# Altium PCB bq25570_board_large.PcbDoc
Units mil, origin at the board's own origin, x right, y up, seen from the top; angles counter-clockwise.
Board outline 3738 x 2350 mil, 2 copper layers (Top, Bottom), stack 61.811 mil thick; 28 components, 19 nets, 83 pads, 0 vias.
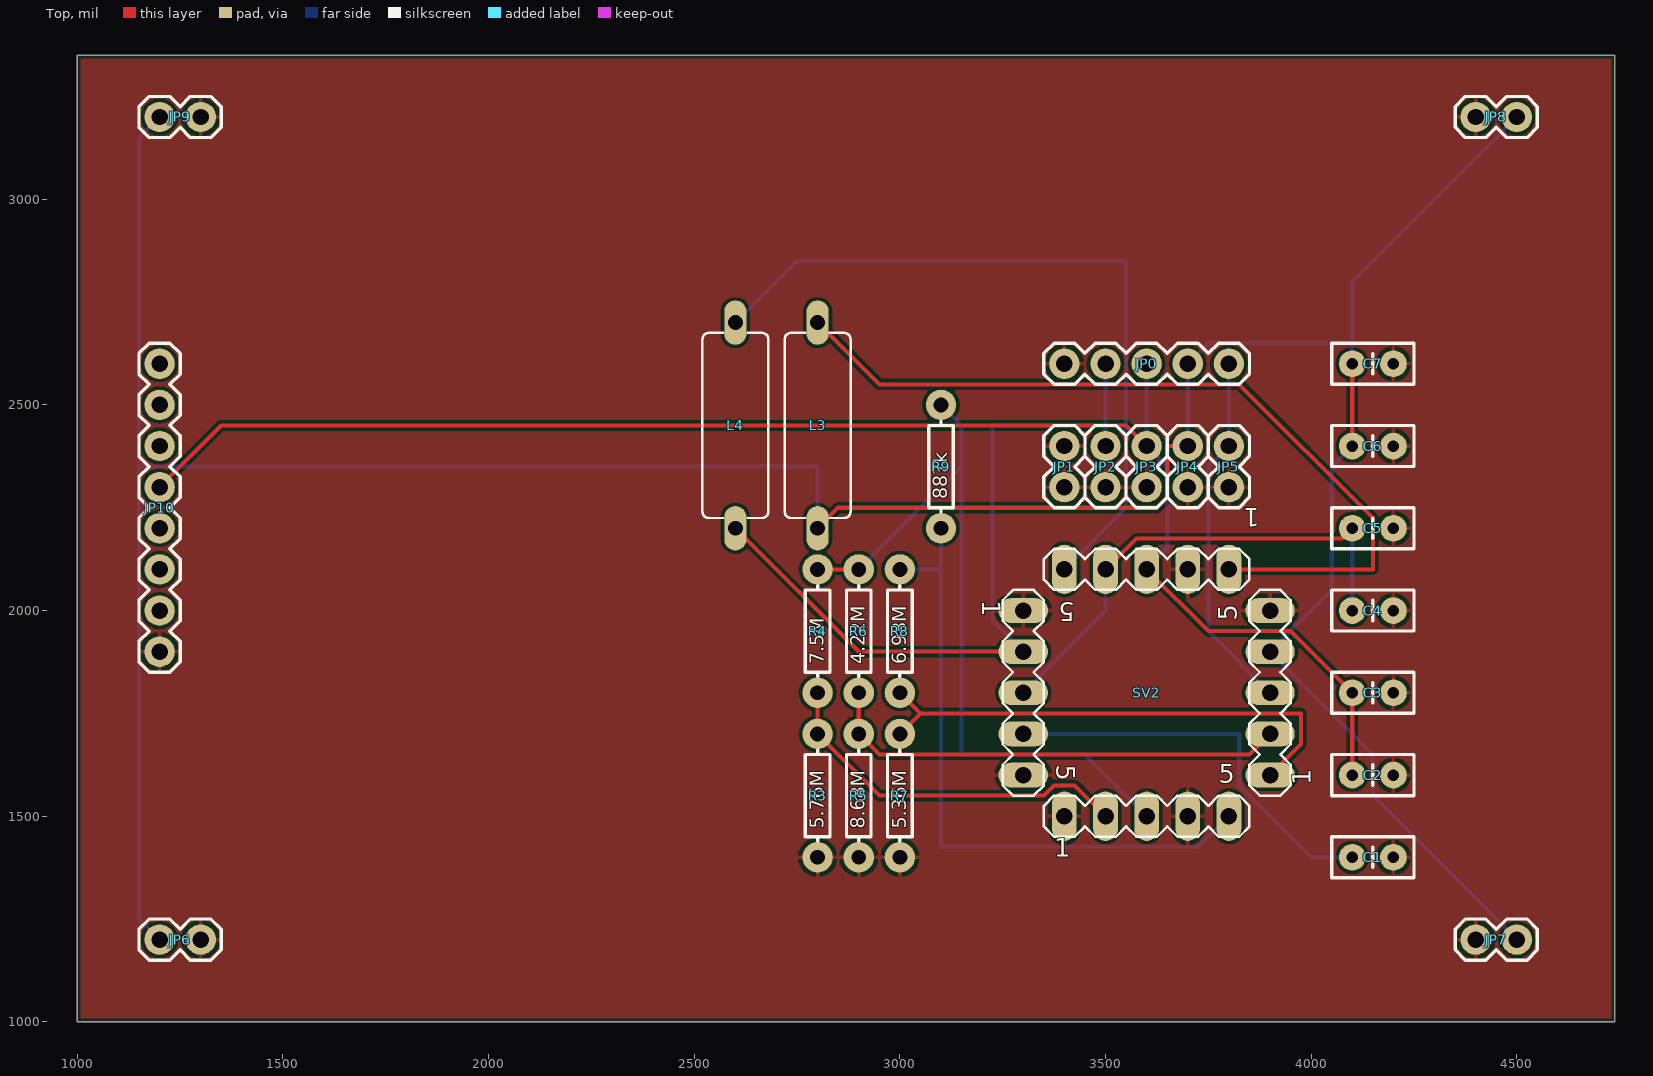
[diagram p0: Top view]
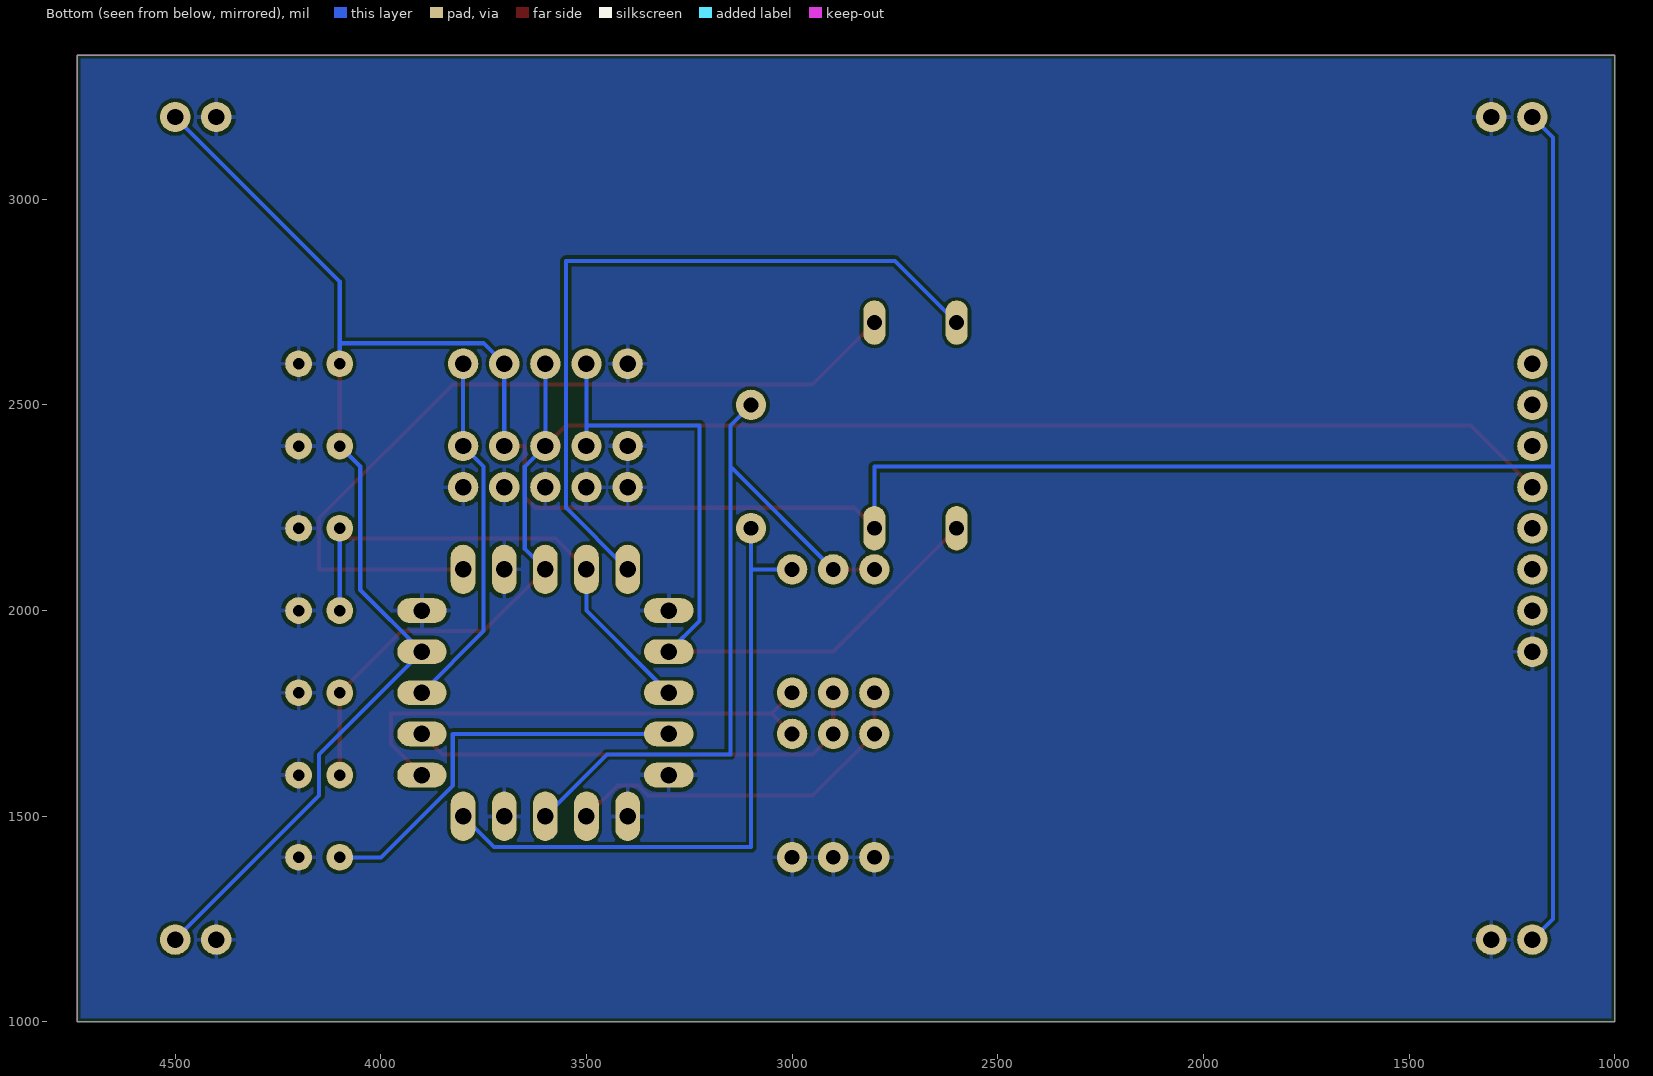
[diagram p1: Bottom view, seen from below]

## Layer stack, top to bottom
Top Solder: solder mask 0.4, Solder Resist, Dk 3.5
Top: signal copper 1.378
Dielectric 1: core 59.0551, FR-4, Dk 4.8
Bottom: signal copper 1.378
Bottom Solder: solder mask 0.4, Solder Resist, Dk 3.5

## Board outline
1000,1000 4738,1000 4738,3350 1000,3350

## Design rules (kind name [scope] priority, off if disabled: settings)
Clearance mdViaVia [IsVia vs IsVia] p1: gap=8
Clearance mdPadVia [IsPad vs IsVia] p2: gap=8
Clearance mdPadPad [IsPad vs IsPad] p3: gap=8
Clearance mdWireVia [(InLayerClass('Signal Layers') AND IsTrack) vs IsVia] p4: gap=8
Clearance mdWirePad [(InLayerClass('Signal Layers') AND IsTrack) vs IsPad] p5: gap=8
Clearance mdWireWire [(InLayerClass('Signal Layers') AND IsTrack) vs (InLayerClass('Signal Layers') AND IsTrack)] p6: gap=8
Clearance [All] p7: gap=8
HoleSize [All] p1: absolutevalues=TRUE maxlimit=100000 minlimit=24 maxpercent=80.000 minpercent=20.000
HoleToHoleClearance [All] p1: gap=8 allowstackedmicrovias=TRUE
PolygonConnect ThermalVias [IsVia] p1: connectstyle=Direct reliefconductorwidth=10 reliefentries=4 polygonreliefangle="90 Angle" airgapwidth=10
PolygonConnect [All] p2: connectstyle=Relief reliefconductorwidth=10 reliefentries=4 polygonreliefangle="90 Angle" airgapwidth=10
RoutingVias [All] p1: holewidth=28 width=50 viastyle="Through Hole" minholewidth=28 minwidth=50 maxholewidth=28 maxwidth=50
SilkToSilkClearance [All] p1 off: silktosilkclearance=10
SilkToSolderMaskClearance [IsPad] p1 off: minsilkscreentomaskgap=10 clearancetoexposedcopper=TRUE
SolderMaskExpansion [All] p1: expansion=4
UnpouredPolygon [All] p1: allowunpoured=FALSE
Width [All] p1: maxlimit=100000 minlimit=10 preferedwidth=10
25 further rules are at their usual default settings.

## Components (designator, comment, footprint, x,y, rotation, side; value= is the part's Value field where it differs from the comment)
C1 "0.01uF" CAP-PTH-SMALLEZ 4100,1400 r0 top
C2 "100uF" CAP-PTH-SMALLEZ 4100,1600 r0 top
C3 "100uF" CAP-PTH-SMALLEZ 4100,1800 r0 top
C4 "4.7uF" CAP-PTH-SMALLEZ 4100,2000 r0 top
C5 "0.1uF" CAP-PTH-SMALLEZ 4100,2200 r0 top
C6 "22uF" CAP-PTH-SMALLEZ 4100,2400 r0 top
C7 "1000uF" CAP-PTH-SMALLEZ 4100,2600 r0 top
JP0 "" 1X05 3400,2600 r0 top
JP1 "" 1X02 3400,2300 r90 top
JP2 "" 1X02 3500,2300 r90 top
JP3 "" 1X02 3600,2300 r90 top
JP4 "" 1X02 3700,2300 r90 top
JP5 "" 1X02 3800,2300 r90 top
JP6 "" 1X02 1200,1200 r0 top
JP7 "" 1X02 4500,1200 r180 top
JP8 "" 1X02 4500,3200 r180 top
JP9 "" 1X02 1200,3200 r0 top
JP10 "" 1X08_ROUND 1200,2600 r270 top
L3 "10uH" BC12 2800,2450 r90 top
L4 "22uH" BC12 2600,2450 r270 top
R3 "5.76M" AXIAL-0.3 2800,1550 r90 top
R4 "7.5M" AXIAL-0.3 2800,1950 r90 top
R5 "8.68M" AXIAL-0.3 2900,1550 r90 top
R6 "4.22M" AXIAL-0.3 2900,1950 r90 top
R7 "5.36M" AXIAL-0.3 3000,1550 r90 top
R8 "6.98M" AXIAL-0.3 3000,1950 r90 top
R9 "887k" AXIAL-0.3 3100,2350 r90 top
SV2 "" MA05-1 3600,1800 r0 top

## Footprints (in the part's own frame and the unit in brackets; to place one, negate y for a bottom-side part, rotate by r counter-clockwise, add the part's x,y. Pads: shape width x height; smd on the part's side, far side on the other; paste and mask are expansions set on the pad)
1X02 [mil] "1X02"
  round 74 hole 40: 1(0,0) 2(100,0)
  silkscreen extent -50,-50 150,50
1X05 [mil] "1X05"
  round 74 hole 40: 1(0,0) 2(100,0) 3(200,0) 4(300,0) 5(400,0)
  silkscreen extent -50,-50 450,50
1X08_ROUND [mil] "1X08_ROUND"
  round 74 hole 40: 1(0,0) 2(100,0) 3(200,0) 4(300,0) 5(400,0) 6(500,0) 7(600,0) 8(700,0)
  silkscreen extent -50,-50 750,50
AXIAL-0.3 [mil] "AXIAL-0.3"
  round 74 hole 36: P$1(-150,0) P$2(150,0)
  silkscreen extent -110,-30 110,30
BC12 [mil] "BC12"
  oval 108x54 hole 36: 1(-250,0) 2(250,0)
  silkscreen extent -225,-80 225,80
CAP-PTH-SMALLEZ [mil] "CAP-PTH-SMALLEZ"
  round 65 hole 28: 1(0,0) 2(100,0)
  silkscreen extent -50,-50 150,50
MA05-1 [mil] "MA05-1"
  oval 120x60 hole 40: 1(-300,200) 2(-300,100) 3(-300,0) 4(-300,-100) 5(-300,-200) 11(300,-200) 12(300,-100) 13(300,0) 14(300,100) 15(300,200)
  oval 60x120 hole 40: 6(-200,-300) 7(-100,-300) 8(0,-300) 9(100,-300) 10(200,-300) 16(200,300) 17(100,300) 18(0,300) 19(-100,300) 20(-200,300)
  silkscreen extent -350,-350 350,350

## Part data
C1 C2 C3 C4 C5 C6 C7: library part CAP-PTH-SMALLEZ
JP0: library part 1X05
JP1 JP2 JP3 JP4 JP5 JP6 JP7 JP8 JP9: library part 1X02
JP10: library part 1X08_ROUND
L3 L4: library part BC12
R3 R4 R5 R6 R7 R8 R9: library part AXIAL-0.3
SV2: library part MA05-1

## Nets (pads, with @x,y where several pads share a name; then routed paths per layer and width w, separated by ;. In a path a pad name is that pad's centre, name@x,y a point inside that pad or via, vN(x,y) a via of type N, cw(c..) or ccw(c..) an arc to the next point about the centre after c; other vN are vias at no path point)
LBOOST: L4.1 SV2.20 | length 1824.3
  Bottom w10: L4.1 2750,2850 3550,2850 3550,2250 SV2.20
LBUCK: L3.2 SV2.16 | length 2021.8
  Top w10: L3.2 2950,2550 3825,2550 4150,2225 4150,2100 SV2.16
N$2: JP10.7
N$3: JP10.6
N$4: JP10.5
N$7: JP10.2
N$8: JP10.1
OK_HYST: R8.P$2 R9.P$1 SV2.10 | length 1606.1
  Bottom w10: R8.P$2 3100,2100 ; R9.P$1 3100,2100 ; SV2.10 3725,1425 3100,1425 3100,2100
OK_PROG: R7.P$2 R8.P$1 SV2.11 | length 1247.5
  Top w10: R7.P$2 3050,1750 ; R8.P$1 3050,1750 ; SV2.11 3975,1675 3975,1750 3050,1750
VBAT: C2.1 C3.1 JP0.3 JP3.2 JP10.4 SV2.18 | length 3848.5
  Top w10: JP10.4 1350,2450 3550,2450 JP3.2 ; SV2.18 3750,1950 3950,1950 C3.1 C2.1
  Bottom w10: SV2.18 3650,2150 3650,2350 JP3.2 JP0.3
VBAT_OK: JP0.5 JP5.2 SV2.13 | length 882.8
  Bottom w10: JP0.5 JP5.2 3750,2350 3750,1950 SV2.13
VBAT_OV: R3.P$2 R4.P$1 SV2.7 | length 903.6
  Top w10: R4.P$1 R3.P$2 2950,1550 3350,1550 3375,1575 3425,1575 SV2.7
VIN: JP0.2 JP2.2 L4.2 SV2.2 | length 1880.3
  Top w10: L4.2 2900,1900 SV2.2
  Bottom w10: SV2.2 3225,1975 3225,2450 3500,2450 ; JP2.2 3500,2450 ; JP0.2 3500,2450
VOUT: C6.1 C7.1 JP0.4 JP4.2 JP6.1 JP7.1 JP8.1 JP9.1 L3.1 SV2.14 | length 8015.3
  Top w10: L3.1 2850,2250 3625,2250 3650,2275 3650,2400 JP4.2 ; C6.1 C7.1
  Bottom w10: JP6.1 1150,1250 1150,2350 ; JP9.1 1150,3150 1150,2350 ; L3.1 2800,2350 1150,2350 ; JP4.2 JP0.4 3750,2650 4100,2650 ; C6.1 4050,2350 4050,2050 SV2.14 4150,1650 4150,1550 JP7.1 ; C7.1 4100,2650 ; JP8.1 4100,2800 4100,2650
VOUT_SET: R5.P$2 R6.P$1 SV2.12 | length 1141.4
  Top w10: R6.P$1 R5.P$2 2950,1650 3850,1650 SV2.12
VRDIV: R4.P$2 R6.P$2 R9.P$2 SV2.8 | length 1836.4
  Top w10: R4.P$2 R6.P$2
  Bottom w10: R6.P$2 3150,2350 ; R9.P$2 3150,2450 3150,2350 ; SV2.8 3450,1650 3150,1650 3150,2350
VREF_SAMP: C1.1 SV2.4 | length 997.5
  Bottom w10: SV2.4 3825,1700 3825,1575 4000,1400 C1.1
VSS: C1.2 C2.2 C3.2 C4.2 C5.2 C6.2 C7.2 JP0.1 JP1.1 JP1.2 JP2.1 JP3.1 JP4.1 JP5.1 JP6.2 JP7.2 JP8.2 JP9.2 JP10.8 R3.P$1 R5.P$1 R7.P$1 SV2.1 SV2.5 SV2.6 SV2.9 SV2.15 SV2.17
VSTOR: C4.1 C5.1 SV2.3 SV2.19 | length 1224.3
  Top w10: SV2.19 3575,2175 4075,2175 C5.1
  Bottom w10: SV2.3 3500,2000 SV2.19 ; C4.1 C5.1
pads on no net: JP10.3

## Polygon pours and split planes (outlines as drawn)
VSS on Bottom "Bottom-VSS" (solid, remove dead copper, pour order 2): 992,992 4808,992 4808,3408 992,3408
VSS on Top "Top-VSS" (solid, remove dead copper, pour order 4): 992,992 4808,992 4808,3408 992,3408

## Keep-outs
Keep-Out Layer:
  the board outline again, w0

## Silkscreen, mask and mechanical layers (free items; w line width, h text height)
Dimension:
  the board outline again, w0

## Text inside footprints (layer, text, board x,y; h text height)
SV2: Top Overlay "1" at 3375,1385 h77.5; Top Overlay "5" at 3775,1565 h77.5; Top Overlay "1" at 3875,2265 h77.5 r180; Top Overlay "5" at 3425,2035 h77.5 r180; Top Overlay "1" at 3185,2025 h77.5 r270; Top Overlay "5" at 3365,1625 h77.5 r270; Top Overlay "1" at 4015,1575 h77.5 r90; Top Overlay "5" at 3835,1975 h77.5 r90